# Altium PCB Stamp-P4.PcbDoc
Units mil, origin at the board's own origin, x right, y up, seen from the top; angles counter-clockwise.
Board outline 6000 x 4000 mil, 2 copper layers (Top Layer, Bottom Layer); 1 components, 0 nets, 65 pads, 0 vias.
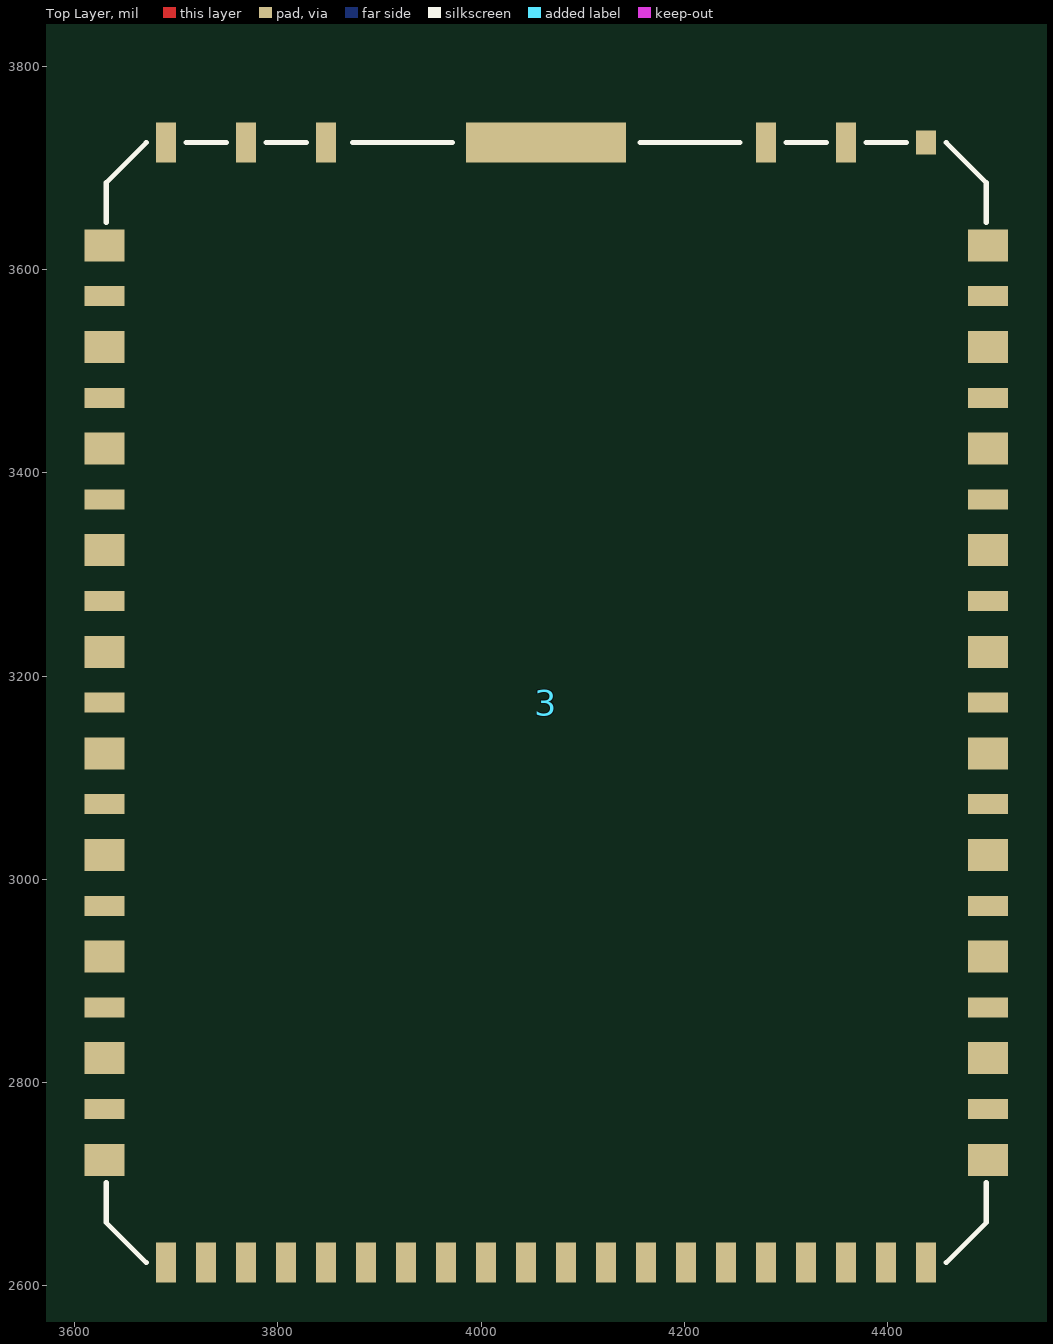
[diagram p0: Top Layer view]
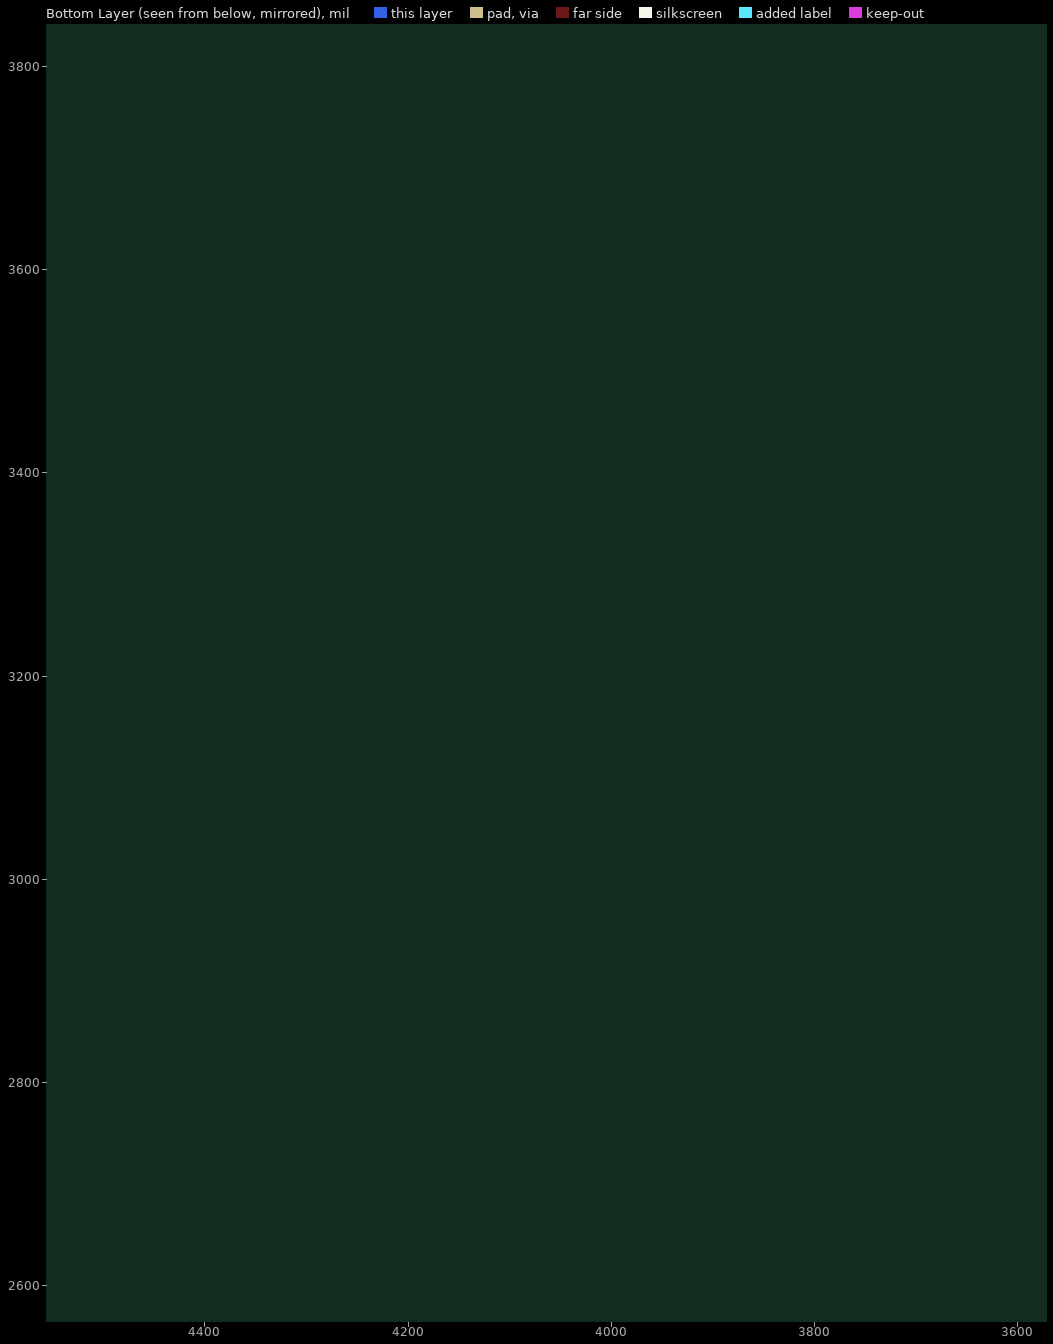
[diagram p1: Bottom Layer view, seen from below]

## Layer stack, top to bottom
Top Solder: solder mask 0.4, Solder Resist, Dk 3.5
Top Layer: signal copper 1.4
Dielectric 1: dielectric 12.6, FR-4, Dk 4.8
Bottom Layer: signal copper 1.4
Bottom Solder: solder mask 0.4, Solder Resist, Dk 3.5

## Board outline
1000,1000 7000,1000 7000,5000 1000,5000

## Design rules (kind name [scope] priority, off if disabled: settings)
Clearance [All] p1: gap=10 ignorepadtopadclearanceinfootprint=FALSE
PolygonConnect [All] p1: connectstyle=Relief reliefconductorwidth=10 reliefentries=4 polygonreliefangle="90 Angle" airgapwidth=10
RoutingVias [All] p1: holewidth=28 width=50 viastyle="Through Hole" minholewidth=28 minwidth=50 maxholewidth=28 maxwidth=50
SolderMaskExpansion [All] p1: expansion=4 istentingtop=FALSE
Width [All] p1: maxlimit=10 minlimit=10 preferedwidth=10
30 further rules are at their usual default settings.

## Components (designator, comment, footprint, x,y, rotation, side; value= is the part's Value field where it differs from the comment)
3 "STAMP_P4" STAMPP4 4064.09,3173.84 r180 top locked (schematic designator STAMP1)

## Footprints (in the part's own frame and the unit in brackets; to place one, negate y for a bottom-side part, rotate by r counter-clockwise, add the part's x,y. Pads: shape width x height; smd on the part's side, far side on the other; paste and mask are expansions set on the pad)
STAMPP4 [mm]
  rect 1x0.8 smd: 1(-11.04,11.43) 3(-11.04,8.89) 5(-11.04,6.35) 7(-11.04,3.81) 9(-11.04,1.27) 11(-11.04,-1.27) 13(-11.04,-3.81) 15(-11.04,-6.35) 17(-11.04,-8.89) 19(-11.04,-11.43) 20(11.04,11.43) 22(11.04,8.89) 24(11.04,6.35) 26(11.04,3.81) 28(11.04,1.27) 30(11.04,-1.27) 32(11.04,-3.81) 34(11.04,-6.35) 36(11.04,-8.89) 38(11.04,-11.43)
  rect 1x0.5 smd: 2(-11.04,10.16) 4(-11.04,7.62) 6(-11.04,5.08) 8(-11.04,2.54) 10(-11.04,0) 12(-11.04,-2.54) 14(-11.04,-5.08) 16(-11.04,-7.62) 18(-11.04,-10.16) 21(11.04,10.16) 23(11.04,7.62) 25(11.04,5.08) 27(11.04,2.54) 29(11.04,0) 31(11.04,-2.54) 33(11.04,-5.08) 35(11.04,-7.62) 37(11.04,-10.16)
  rect 0.5x0.6 smd: 39(-9.5,-14)
  rect 0.5x1 smd: 40(-7.5,-14) 41(-5.5,-14) 43(5.5,-14) 44(7.5,-14) 45(9.5,-14) 46(-9.5,14) 47(-8.5,14) 48(-7.5,14) 49(-6.5,14) 50(-5.5,14) 51(-4.5,14) 52(-3.5,14) 53(-2.5,14) 54(-1.5,14) 55(-0.5,14) 56(0.5,14) 57(1.5,14) 58(2.5,14) 59(3.5,14) 60(4.5,14) 61(5.5,14) 62(6.5,14) 63(7.5,14) 64(8.5,14) 65(9.5,14)
  rect 4x1 smd: 42(0,-14)
  silkscreen extent -11,-14 11,14, body extent -11,-15.78 11,14, height 4.26

## Part data
3: library part StampP4, JLCPCB Part Class="Extended Part", LCSC Part Name=ESP32-P4NRW32, Manufacturer=ESPRESSIF(乐鑫), Add into BOM=yes, Convert to PCB=yes, Datasheet=https://atta.szlcsc.com/upload/public/pdf/source/20240809/B078A3F5F7FA78742834A9F44EEEC69A.pdf, Device=ESP32-P4NRW32_C22387510, Manufacturer Part=ESP32-P4NRW32, Supplier=LCSC, Supplier Footprint=QFN-104(10x10), Supplier Part=C22387510, Symbol=ESP32-P4NRW32_C22387510

## Nets (pads, with @x,y where several pads share a name; then routed paths per layer and width w, separated by ;. In a path a pad name is that pad's centre, name@x,y a point inside that pad or via, vN(x,y) a via of type N, cw(c..) or ccw(c..) an arc to the next point about the centre after c; other vN are vias at no path point)
pads on no net: 3.1 3.2 3.3 3.4 3.5 3.6 3.7 3.8 3.9 3.10 3.11 3.12 3.13 3.14 3.15 3.16 3.17 3.18 3.19 3.20 3.21 3.22 3.23 3.24 3.25 3.26 3.27 3.28 3.29 3.30 3.31 3.32 3.33 3.34 3.35 3.36 3.37 3.38 3.39 3.40 3.41 3.42 3.43 3.44 3.45 3.46 3.47 3.48 3.49 3.50 3.51 3.52 3.53 3.54 3.55 3.56 3.57 3.58 3.59 3.60 3.61 3.62 3.63 3.64 3.65